# EAGLE board Rover (EAGLE 9.5.1)

Size 131.75 x 213.35 mm. Coordinates in mm from the lower left corner, seen from the top.
Outline: 0,0 131.75,0 131.75,213.35 0,213.35 0,0
Copper layers (1*16): Top 0.035mm / dielectric 1.5mm / Bottom 0.035mm
Design rules "default *": minimum track width 12mil, minimum drill 20mil, track to track 12mil, track to pad 12mil, pad to pad 12mil, via to via 12mil, smd to smd 12mil, copper to edge 40mil, drill to drill 12mil, minimum pad ring 10mil, minimum via ring 8mil, stop-mask expansion 4mil, vias tented up to drill 0mil, thermal gap 10mil

## Footprints (pad centres in the part's own frame; a part is rotated, then mirrored left to right if it is on the bottom)
ARDUINO_MEGA_NO_SILK = drill 1.016 pad 1.88: 0 13.97,24.13; 1 11.43,24.13; 2 8.89,24.13; 3 6.35,24.13; 3.3V -13.97,-24.13; 4 3.81,24.13; 5 1.27,24.13; 5V -11.43,-24.13; 5V@1 44.45,24.13; 5V@2 46.99,24.13; 6 -1.27,24.13; 7 -3.81,24.13; 8 -7.62,24.13; 9 -10.16,24.13; 10 -12.7,24.13; 11 -15.24,24.13; 12 -17.78,24.13; 13 -20.32,24.13; 14 19.05,24.13; 15 21.59,24.13; 16 24.13,24.13; 17 26.67,24.13; 18 29.21,24.13; 19 31.75,24.13; 20 34.29,24.13; 21 36.83,24.13; A0 1.27,-24.13; A1 3.81,-24.13; A2 6.35,-24.13; A3 8.89,-24.13; A4 11.43,-24.13; A5 13.97,-24.13; A6 16.51,-24.13; A7 19.05,-24.13; A8 24.13,-24.13; A9 26.67,-24.13; A10 29.21,-24.13; A11 31.75,-24.13; A12 34.29,-24.13; A13 36.83,-24.13; A14 39.37,-24.13; A15 41.91,-24.13; AREF -25.4,24.13; GND -8.89,-24.13; GND@1 -6.35,-24.13; GND@2 44.45,-19.05; GND@3 46.99,-19.05; GND@4 -22.86,24.13; IOREF -19.05,-24.13; NC -21.59,-24.13; RESET -16.51,-24.13; SCL -30.48,24.13; SDA -27.94,24.13; VIN -3.81,-24.13 | drill 1.016 pad 1.88 octagon: 22 44.45,21.59; 23 46.99,21.59; 24 44.45,19.05; 25 46.99,19.05; 26 44.45,16.51; 27 46.99,16.51; 28 44.45,13.97; 29 46.99,13.97; 30 44.45,11.43; 31 46.99,11.43; 32 44.45,8.89; 33 46.99,8.89; 34 44.45,6.35; 35 46.99,6.35; 36 44.45,3.81; 37 46.99,3.81; 38 44.45,1.27; 39 46.99,1.27; 40 44.45,-1.27; 41 46.99,-1.27; 42 44.45,-3.81; 43 46.99,-3.81; 44 44.45,-6.35; 45 46.99,-6.35; 46 44.45,-8.89; 47 46.99,-8.89; 48 44.45,-11.43; 49 46.99,-11.43; 50 44.45,-13.97; 51 46.99,-13.97; 52 44.45,-16.51; 53 46.99,-16.51
CAP-PTH-10MM = drill 0.9 pad 1.651: 1 -5,0; 2 5,0
TO92-INLINE = drill 0.813 pad 1.676 octagon: 1 -2.159,0; 2 0,0; 3 2.159,0
2X20 = drill 1.016 pad 1.88: 1 0,0; 2 0,2.54; 3 2.54,0; 4 2.54,2.54; 5 5.08,0; 6 5.08,2.54; 7 7.62,0; 8 7.62,2.54; 9 10.16,0; 10 10.16,2.54; 11 12.7,0; 12 12.7,2.54; 13 15.24,0; 14 15.24,2.54; 15 17.78,0; 16 17.78,2.54; 17 20.32,0; 18 20.32,2.54; 19 22.86,0; 20 22.86,2.54; 21 25.4,0; 22 25.4,2.54; 23 27.94,0; 24 27.94,2.54; 25 30.48,0; 26 30.48,2.54; 27 33.02,0; 28 33.02,2.54; 29 35.56,0; 30 35.56,2.54; 31 38.1,0; 32 38.1,2.54; 33 40.64,0; 34 40.64,2.54; 35 43.18,0; 36 43.18,2.54; 37 45.72,0; 38 45.72,2.54; 39 48.26,0; 40 48.26,2.54
1X10M = drill 0.914 square: 1 -9,0 | drill 0.914: 2 -7,0; 3 -5,0; 4 -3,0; 5 -1,0; 6 1,0; 7 3,0; 8 5,0; 9 7,0; 10 9,0
1X06 = drill 1.016 long: 1 -6.35,0; 2 -3.81,0; 3 -1.27,0; 4 1.27,0; 5 3.81,0; 6 6.35,0
1X04 = drill 1.016 long: 1 -3.81,0; 2 -1.27,0; 3 1.27,0; 4 3.81,0
1X01 = drill 1.016 octagon: 1 0,0
1X08 = drill 1.016 long: 1 -8.89,0; 2 -6.35,0; 3 -3.81,0; 4 -1.27,0; 5 1.27,0; 6 3.81,0; 7 6.35,0; 8 8.89,0
1X05 = drill 1.016 long: 1 -5.08,0; 2 -2.54,0; 3 0,0; 4 2.54,0; 5 5.08,0
LED5MM = drill 0.813 octagon: A -1.27,0; K 1.27,0
1X03 = drill 1.016 pad 1.88: 1 0,0; 2 2.54,0; 3 5.08,0
0207/12 = drill 0.813 octagon: 1 -6.35,0; 2 6.35,0
EG1213 = drill 0.7 pad 1.422: 1 -2,0; 2 0,0; 3 1.9,0 | drill 1.4 pad 2.54: MT1 -4.8,0; MT2 4.8,0
TO-92 = drill 0.787 pad 1.295: 1 -2.54,-2.54 | drill 0.787 pad 1.295 square: 2 -1.27,0; 3 0,-2.54
POWERBOOST500 = drill 1.016: 1 10.16,20.32; 2 12.7,20.32; 3 15.24,20.32; 4 17.78,20.32; 5 20.32,20.32; 6 22.86,20.32; 7 25.4,20.32; 8 27.94,20.32 | hole 2.54: 2.54,19.05; 2.54,2.54; 33.02,17.78; 33.02,3.81
XBEE = drill 0.7 pad 1.422 square: 1 -11,5.5 | drill 0.7 pad 1.422: 2 -11,3.5; 3 -11,1.5; 4 -11,-0.5; 5 -11,-2.5; 6 -11,-4.5; 7 -11,-6.5; 8 -11,-8.5; 9 -11,-10.5; 10 -11,-12.5; 11 11,-12.5; 12 11,-10.5; 13 11,-8.5; 14 11,-6.5; 15 11,-4.5; 16 11,-2.5; 17 11,-0.5; 18 11,1.5; 19 11,3.5; 20 11,5.5

## Placement (x,y rotation side)
B1  ARDUINO_MEGA_R3FULL  [ARDUINO_MEGA_NO_SILK]  44.45,132.08 0 top
C1  10nF  [CAP-PTH-10MM]  107.95,158.75 270 top
C2  10nF  [CAP-PTH-10MM]  53.34,115.57 90 top
FRAME1  FRAME-LETTERNO_PACKAGE  [DUMMY]  -114.3,165.1 0 top  (outside the outline)
FRAME2  FRAME-LETTERNO_PACKAGE  [DUMMY]  -116.84,165.1 0 top  (outside the outline)
FRAME3  FRAME-LETTERNO_PACKAGE  [DUMMY]  -12.7,171.45 0 top  (outside the outline)
IC2  MCP1700-3302E/TO-ND  [TO92-INLINE]  114.3,96.52 180 top
J1  RASPBERRYPI-40-PIN-GPIO_PTH_NO_SHROUD  [2X20]  17.78,30.48 0 top
JP1  XBEE_H2  [1X10M]  89.76,189.53 270 top
JP2  XBEE_H1  [1X10M]  67.74,189.56 90 top
JP_9DOFL  [1X06]  49.53,165.1 0 top
JP_9DOFR  [1X04]  49.53,175.26 180 top
JP_HIGH  [1X01]  78.74,30.48 0 top
JP_LOW  [1X01]  85.09,30.48 0 top
JP_MD1L  [1X08]  21.59,190.5 90 top
JP_MD1R  [1X08]  34.29,190.5 270 top
JP_MD2L  [1X08]  44.45,59.69 0 top
JP_MD2R  [1X08]  44.45,74.93 180 top
JP_MLF  [1X06]  3.81,190.5 270 top
JP_MLR  [1X06]  6.35,54.61 90 top
JP_MRF  [1X06]  99.06,179.07 270 top
JP_MRR  [1X06]  105.41,38.1 90 top
JP_SERVO  [1X04]  5.08,168.91 90 top
JP_US  [1X05]  50.8,205.74 0 top
LED1  POWERLED  [LED5MM]  67.31,40.64 180 top
LED2  POWERLED  [LED5MM]  68.58,69.85 0 top
M2  SERVO  [1X03]  5.08,167.64 90 top
R1  10k  [0207/12]  85.09,45.72 270 top
R2  10k  [0207/12]  72.39,193.04 90 top
R3  47  [0207/12]  48.26,50.8 270 top
R4  10  [0207/12]  54.61,40.64 0 top
R5  4.7k  [0207/12]  83.82,76.2 90 bottom
R6  10k  [0207/12]  80.01,76.2 270 top
R7  680  [0207/12]  76.2,76.2 270 top
R8  22k  [0207/12]  66.04,92.71 180 bottom
R9  10k  [0207/12]  66.04,96.52 180 top
R10  10k  [0207/12]  39.37,92.71 0 top
R11  10k  [0207/12]  25.4,58.42 90 bottom
R12  4.7k  [0207/12]  55.88,146.05 90 top
R13  10k  [0207/12]  81.28,96.52 0 top
R14  0  [0207/12]  96.52,31.75 0 bottom
R15  0  [0207/12]  96.52,34.29 180 top
R16  0  [0207/12]  123.19,154.94 180 top
R17  0  [0207/12]  45.72,83.82 270 top
R18  0  [0207/12]  109.22,111.76 180 top
R19  0  [0207/12]  78.74,39.37 90 top
R20  0  [0207/12]  118.11,64.77 0 top
R21  0  [0207/12]  31.75,67.31 90 top
R22  0  [0207/12]  27.94,179.07 0 top
R23  0  [0207/12]  11.43,190.5 90 top
R24  0  [0207/12]  53.34,50.8 270 bottom
R25  0  [0207/12]  63.5,146.05 90 top
R26  0  [0207/12]  66.04,146.05 90 top
R27  0  [0207/12]  15.24,193.04 90 top
R28  0  [0207/12]  15.24,55.88 0 top
R29  0  [0207/12]  50.8,97.79 270 top
R30  0  [0207/12]  55.88,99.06 90 bottom
R31  0  [0207/12]  68.58,165.1 270 top
R32  0  [0207/12]  71.12,167.64 270 top
R33  0  [0207/12]  95.25,160.02 90 top
R34  0  [0207/12]  12.7,130.81 180 top
R35  0  [0207/12]  45.72,196.85 270 top
R36  0  [0207/12]  55.88,196.85 270 top
R37  0  [0207/12]  43.18,83.82 90 top
R38  0  [0207/12]  73.66,146.05 90 top
R39  0  [0207/12]  76.2,146.05 270 top
R40  0  [0207/12]  17.78,41.91 90 top
R41  0  [0207/12]  43.18,147.32 90 top
R42  0  [0207/12]  104.14,140.97 0 top
R43  0  [0207/12]  96.52,44.45 180 top
R44  0  [0207/12]  45.72,50.8 270 top
R45  0  [0207/12]  43.18,50.8 270 top
R46  0  [0207/12]  104.14,133.35 180 top
R47  0  [0207/12]  109.22,114.3 180 top
R48  0  [0207/12]  104.14,138.43 0 top
R49  0  [0207/12]  104.14,135.89 0 top
R50  0  [0207/12]  27.94,43.18 270 top
R51  0  [0207/12]  25.4,43.18 270 top
R52  0  [0207/12]  50.8,196.85 270 top
R53  0  [0207/12]  53.34,196.85 270 top
R54  0  [0207/12]  13.97,170.18 0 top
R55  0  [0207/12]  13.97,172.72 0 top
S1  EG1213  [EG1213]  119.38,114.3 90 top
S2  EG1213  [EG1213]  123.19,165.1 270 bottom
U1  2N7000RLRAG  [TO-92]  105.41,194.31 270 top
U2  2N7000RLRAG  [TO-92]  80.01,55.88 180 top
U$1  POWERBOOST500C  [POWERBOOST500]  129.54,49.53 90 top
U$2  XBEE  [XBEE]  78.74,193.04 0 top

## Library data of the parts
B1 = SparkFun-Boards
C1 C2 = SparkFun-Capacitors; PROD_ID: CAP-09321
FRAME1-FRAME3 = SparkFun-Aesthetics; DESIGNER: Lesley Wheat; VERSION: v01
IC2 S1 S2 U$2 = adafruit
J1 = SparkFun-Connectors
JP1 JP2 = pinhead-2
JP_9DOFL JP_9DOFR JP_HIGH JP_LOW JP_MD1L JP_MD1R JP_MD2L JP_MD2R JP_SERVO JP_US = pinhead
JP_MLF = pinhead; MOTOR: LEFT_FRONT
JP_MLR = pinhead; MOTOR: LEFT_REAR
JP_MRF = pinhead; MOTOR: RIGHT_FRONT
JP_MRR = pinhead; MOTOR: RIGHT_REAR
LED1 LED2 = led
M2 = SparkFun-Electromechanical
R1-R55 = resistor
U1 U2 = 2N7000RLRAG; BUILT_BY: EMA_UL_Team; MANUFACTURER_PART_NUMBER: 2N7000RLRAG; VENDOR: ON Semiconductor
U$1 = jos-ph

## Nets
3.3V: IC2.3 J1.1 J1.17 JP2.10 R2.2 R11.2 U1.2 U2.2 U$2.1
3VO: JP_9DOFL.2
5V: IC2.2 JP_9DOFL.1 JP_MD1L.7 JP_MD1R.4 JP_MD2L.7 JP_MD2R.4 JP_MRF.4 JP_MRR.4 LED1.A R1.2 R17.2 R23.2 R28.2 R36.2 R40.2 R47.2 R54.2
12V: C1.2 LED2.A R8.2 R16.2 R24.2 R27.1
AI1: JP_9DOFR.3
AI2: JP_9DOFR.4
BAT_MONITOR_12V: R8.1 R9.2 R30.1
DIN: JP2.8 R5.1 R6.2 U$2.3
DOUT: JP2.9 R2.1 U2.1 U$2.2
ECHO: R33.2 R52.2
GI1: JP_9DOFR.1
GI2: JP_9DOFR.2
GND: B1.GND B1.GND@1 B1.GND@2 B1.GND@3 B1.GND@4 C1.1 C2.2 IC2.1 J1.6 J1.9 J1.14 J1.20 J1.25 J1.30 J1.34 J1.39 JP2.1 JP_9DOFL.3 JP_LOW.1 JP_MD1L.1 JP_MD1L.6 JP_MD2L.6 JP_MD2R.8 JP_MLF.3 JP_MLR.3 JP_MRF.3 JP_MRR.3 R3.1 R6.1 R7.1 R9.1 R13.1 R21.2 R22.1 R35.2 R55.2 U$1.2 U$1.7 U$2.10
LF_ENC: JP_MLF.6 R32.1
LF_OP1: B1.26 JP_MD1R.3
LF_OP2: B1.28 JP_MD1R.2
LF_PWM: B1.3 JP_MD1R.1
LR_ENC: JP_MLR.6 R26.1
LR_OP1: JP_MD2R.3 R42.2
LR_OP2: JP_MD2R.2 R48.2
LR_PWM: B1.5 JP_MD2R.1
N$1: B1.IOREF
N$2: JP2.3 U$2.8
N$3: B1.RESET
N$4: B1.6 R41.2
N$5: B1.3.3V
N$6: B1.5V B1.5V@1 B1.5V@2
N$7: JP_MRR.1 R14.1
N$8: J1.40
N$9: B1.VIN
N$10: JP_US.1 R35.1
N$11: R19.2 S2.1
N$12: LED2.K R7.2
N$13: J1.37
N$14: R10.2 R17.1
N$15: B1.A5
N$16: B1.A6
N$17: B1.A7
N$18: B1.A8
N$19: B1.A9
N$20: B1.A10
N$21: B1.A11
N$22: B1.A12
N$23: B1.A13
N$24: B1.A14
N$25: B1.A15
N$26: R18.2 U$1.8
N$27: JP_MRR.2 R15.1
N$28: R16.1 S2.2
N$29: JP1.1 U$2.20
N$30: R18.1 S1.1
N$31: JP_HIGH.1 R19.1
N$32: R20.1 U$1.3
N$33: JP_MD2L.1 R21.1
N$34: JP_MD1R.8 R22.2
N$35: JP_MLF.4 R23.1
N$36: B1.39 R46.2
N$37: JP1.2 U$2.19
N$38: JP1.3 U$2.18
N$39: JP1.4 U$2.17
N$40: JP1.5 U$2.16
N$41: JP1.6 U$2.15
N$42: JP1.7 U$2.14
N$43: JP1.8 U$2.13
N$44: JP1.9 U$2.12
N$45: JP1.10 U$2.11
N$46: JP2.2 U$2.9
N$47: JP2.4 U$2.7
N$48: R47.1 S1.2
N$49: JP2.6 U$2.5
N$50: JP2.7 U$2.4
N$51: B1.37 R49.1
N$52: B1.35 R48.1
N$53: JP_MD2L.8 R24.1
N$54: R12.1 R13.2 R50.1
N$55: R11.1 R51.1 U1.1
N$56: B1.14 R25.2
N$57: B1.16 R31.2
N$58: JP_MLR.4 R28.1
N$59: JP_MD1L.8 R27.2
N$60: B1.A2 R29.1
N$61: B1.A4 R30.2
N$62: B1.23 R33.1
N$63: B1.15 R26.2
N$64: B1.38
N$65: B1.40
N$66: B1.42
N$67: B1.44
N$68: B1.46
N$69: B1.48
N$70: B1.50
N$71: B1.52
N$72: B1.17 R32.2
N$73: B1.A1 R34.1
N$74: JP_US.5 R36.1
N$75: B1.AREF
N$76: R5.2 R38.1
N$77: B1.13
N$78: B1.12
N$79: B1.11
N$80: JP_MD2R.5 R37.1
N$81: R1.1 R39.2 U2.3
N$82: J1.2 J1.4 R40.1
N$83: B1.33 R42.1
N$84: JP_MRR.6 R43.1
N$85: JP_MD2L.4 R45.1
N$86: JP_MD2L.5 R44.1
N$87: JP_US.3 R52.1
N$88: JP_US.4 R53.1
N$89: JP_SERVO.3 M2.2 R54.1
N$90: JP_SERVO.4 M2.3 R55.1
N$93: B1.20
N$94: B1.21
N$96: LED1.K R4.2
N$97: R3.2 R4.1
N$98: JP_MLR.1 R44.2
N$102: JP_MLR.2 R45.2
N$103: JP_MD2L.3 R15.2
N$105: JP_MD2L.2 R14.2
N$106: JP_MD1L.5 JP_MLF.1
N$108: JP_MD1L.4 JP_MLF.2
N$109: JP_MD1L.3 JP_MRF.2
N$111: JP_MD1L.2 JP_MRF.1
RF_ENC: JP_MRF.6 R31.1
RF_OP1: B1.10 JP_MD1R.5
RF_OP2: B1.9 JP_MD1R.6
RF_PWM: B1.4 JP_MD1R.7
RR_ENC: R25.1 R43.2
RR_OP1: R37.2 R49.2
RR_OP2: JP_MD2R.6 R46.1
RR_PWM: JP_MD2R.7 R41.1
RSSI: B1.A3 C2.1 JP2.5 U$2.6
RST: JP_9DOFL.6
RX0_ARD: B1.0 R10.1 U1.3
RXA: B1.19 R39.1
RXI_RPI: J1.10 R50.2
SCL: B1.SCL JP_9DOFL.4
SDA: B1.SDA JP_9DOFL.5
SERVO_FEEDBACK: JP_SERVO.1 R34.2
SERVO_SIG: B1.2 JP_SERVO.2 M2.1
TRIG: B1.8 R53.2
TX0_ARD: B1.1 R12.2
TXA: B1.18 R38.2
TXO_RPI: J1.8 R51.2
V_BATT: R20.2 R29.2

## Tracks (layer width: path | path; a pad name or v marks a point on that pad's centre or on a via)
3.3V  (8 unrouted)
5V  (16 unrouted)
12V  (5 unrouted)
BAT_MONITOR_12V  (2 unrouted)
DIN  (3 unrouted)
DOUT  (3 unrouted)
ECHO  (1 unrouted)
GND  (36 unrouted)
LF_ENC  (1 unrouted)
LF_OP1  (1 unrouted)
LF_OP2  (1 unrouted)
LF_PWM  (1 unrouted)
LR_ENC  (1 unrouted)
LR_OP1  (1 unrouted)
LR_OP2  (1 unrouted)
LR_PWM  (1 unrouted)
N$2  (1 unrouted)
N$4  (1 unrouted)
N$6  (2 unrouted)
N$7  (1 unrouted)
N$10  (1 unrouted)
N$11  (1 unrouted)
N$12  (1 unrouted)
N$14  (1 unrouted)
N$26  (1 unrouted)
N$27  (1 unrouted)
N$28  (1 unrouted)
N$29  (1 unrouted)
N$30  (1 unrouted)
N$31  (1 unrouted)
N$32  (1 unrouted)
N$33  (1 unrouted)
N$34  (1 unrouted)
N$35  (1 unrouted)
N$36  (1 unrouted)
N$37  (1 unrouted)
N$38  (1 unrouted)
N$39  (1 unrouted)
N$40  (1 unrouted)
N$41  (1 unrouted)
N$42  (1 unrouted)
N$43  (1 unrouted)
N$44  (1 unrouted)
N$45  (1 unrouted)
N$46  (1 unrouted)
N$47  (1 unrouted)
N$48  (1 unrouted)
N$49  (1 unrouted)
N$50  (1 unrouted)
N$51  (1 unrouted)
N$52  (1 unrouted)
N$53  (1 unrouted)
N$54  (2 unrouted)
N$55  (2 unrouted)
N$56  (1 unrouted)
N$57  (1 unrouted)
N$58  (1 unrouted)
N$59  (1 unrouted)
N$60  (1 unrouted)
N$61  (1 unrouted)
N$62  (1 unrouted)
N$63  (1 unrouted)
N$72  (1 unrouted)
N$73  (1 unrouted)
N$74  (1 unrouted)
N$76  (1 unrouted)
N$80  (1 unrouted)
N$81  (2 unrouted)
N$82  (2 unrouted)
N$83  (1 unrouted)
N$84  (1 unrouted)
N$85  (1 unrouted)
N$86  (1 unrouted)
N$87  (1 unrouted)
N$88  (1 unrouted)
N$89  (1 unrouted)
N$90  (1 unrouted)
N$96  (1 unrouted)
N$97  (1 unrouted)
N$98  (1 unrouted)
N$102  (1 unrouted)
N$103  (1 unrouted)
N$105  (1 unrouted)
N$106  (1 unrouted)
N$108  (1 unrouted)
N$109  (1 unrouted)
N$111  (1 unrouted)
RF_ENC  (1 unrouted)
RF_OP1  (1 unrouted)
RF_OP2  (1 unrouted)
RF_PWM  (1 unrouted)
RR_ENC  (1 unrouted)
RR_OP1  (1 unrouted)
RR_OP2  (1 unrouted)
RR_PWM  (1 unrouted)
RSSI  (3 unrouted)
RX0_ARD  (2 unrouted)
RXA  (1 unrouted)
RXI_RPI  (1 unrouted)
SCL  (1 unrouted)
SDA  (1 unrouted)
SERVO_FEEDBACK  (1 unrouted)
SERVO_SIG  (1 unrouted)
TRIG  (1 unrouted)
TX0_ARD  (1 unrouted)
TXA  (1 unrouted)
TXO_RPI  (1 unrouted)
V_BATT  (1 unrouted)
(copper drawn outside any net)
  shapes: Top area x1